# Altium PCB TP3.PcbDoc
Units mm, origin at the board's own origin, x right, y up, seen from the top; angles counter-clockwise.
Board outline 39.6 x 79.35 mm, 2 copper layers (Top Layer, Bottom Layer); 36 components, 23 nets, 140 pads, 2 vias.
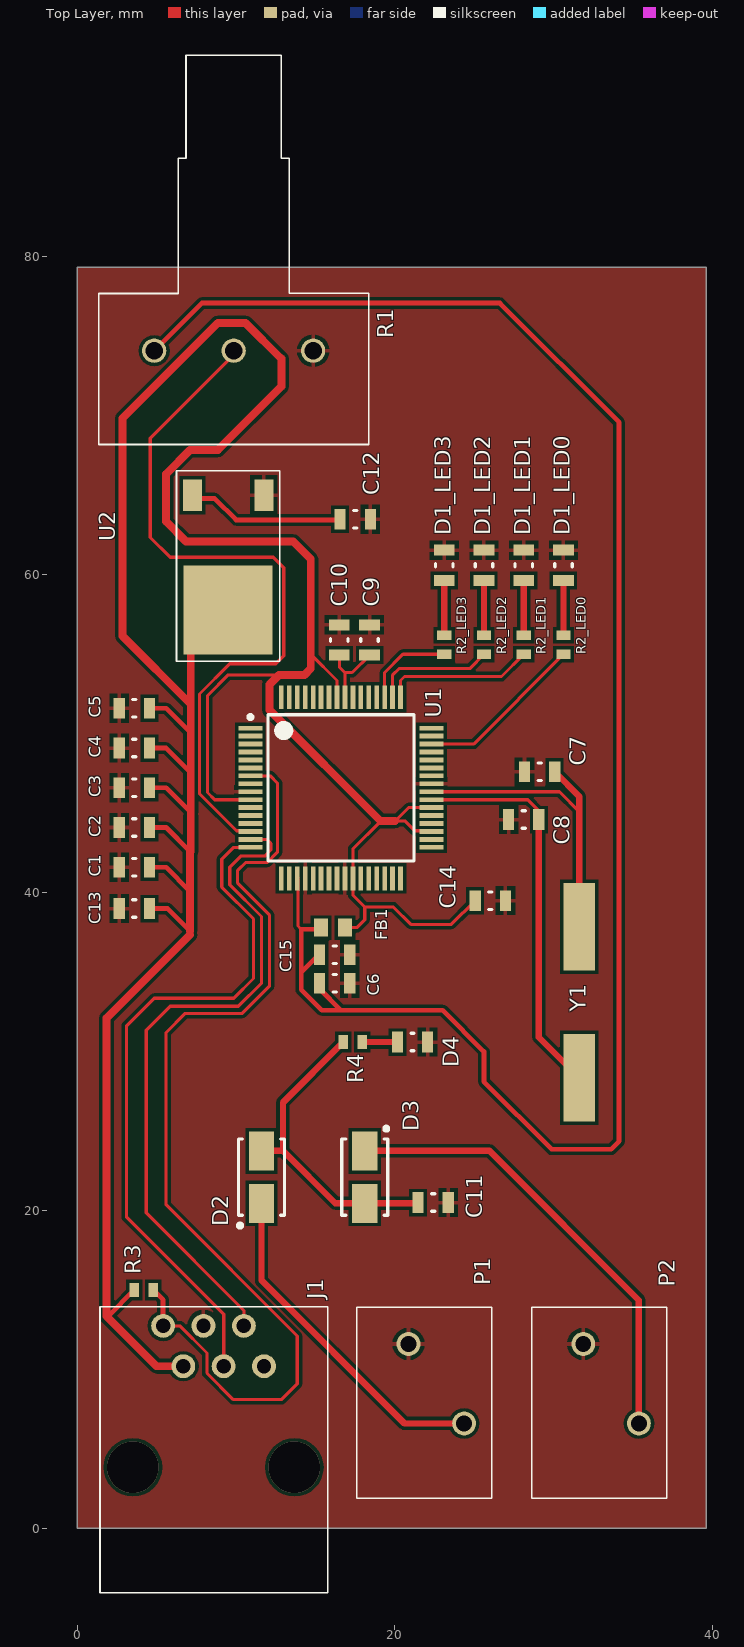
[diagram p0: Top Layer view]
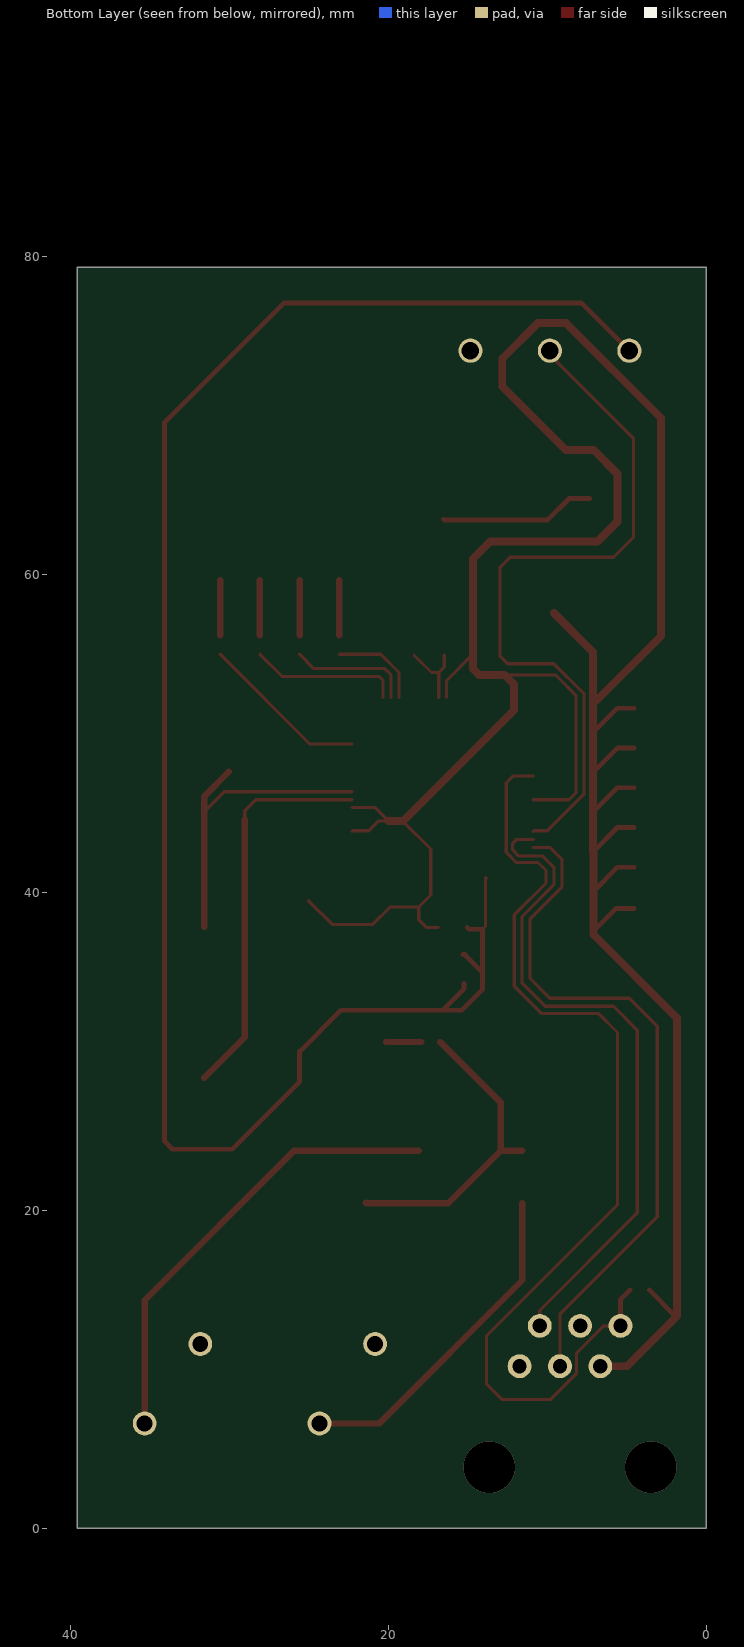
[diagram p1: Bottom Layer view, seen from below]

## Layer stack, top to bottom
Top Solder: solder mask 0.0102, Solder Resist, Dk 3.5
Top Layer: signal copper 0.0356
Dielectric 1: dielectric 0.32, FR-4, Dk 4.8
Bottom Layer: signal copper 0.0356
Bottom Solder: solder mask 0.0102, Solder Resist, Dk 3.5

## Board outline
0,0 39.6,0 39.6,79.35 0,79.35

## Design rules (kind name [scope] priority, off if disabled: settings)
Clearance [All] p1: gap=0.2
HoleSize [All] p1: absolutevalues=TRUE maxlimit=1000 minlimit=0.3 maxpercent=80.000 minpercent=20.000
PolygonConnect [All] p1: connectstyle=Relief reliefconductorwidth=0.254 reliefentries=4 polygonreliefangle="90 Angle" airgapwidth=0.254
RoutingVias [All] p1: holewidth=0.5 width=1.27 viastyle="Through Hole" minholewidth=0.3 minwidth=1.27 maxholewidth=0.711 maxwidth=1.27
SilkToBoardRegionClearance [All] p1 off:
SilkToSilkClearance [All] p1: silktosilkclearance=0.1
SilkToSolderMaskClearance [IsPad] p1: minsilkscreentomaskgap=0.1 clearancetoexposedcopper=TRUE
SolderMaskExpansion [All] p1: expansion=0.102
UnpouredPolygon [All] p1: allowunpoured=FALSE
Width [All] p1: maxlimit=0.5 minlimit=0.2 preferedwidth=0.3
25 further rules are at their usual default settings.

## Classes and differential pairs
channel class led: LED0 LED1 LED2 LED3
net class LED[0..3]: LED0 LED1 LED2 LED3
component class TP2: R1
component class POWER: C11 C12 C13 C14 C15 D2 D3 D4 FB1 P1 P2 R4 U2
component class PIC: C1 C2 C3 C4 C5 C6 C7 C8 C9 C10 J1 R3 Y1
component class LED3: D1_LED3 R2_LED0
component class LED2: D1_LED2 R2_LED0
component class LED1: D1_LED1 R2_LED0
component class LED0: D1_LED0 R2_LED0

## Components (designator, comment, footprint, x,y, rotation, side; value= is the part's Value field where it differs from the comment)
C1 "100nF" 2012/0805 3.6,41.6 r0 top
C2 "100nF" 2012/0805 3.6,44.1 r0 top
C3 "100nF" 2012/0805 3.6,46.6 r0 top
C4 "100nF" 2012/0805 3.6,49.1 r0 top
C5 "100nF" 2012/0805 3.6,51.6 r0 top
C6 "100nF" 2012/0805 16.2,36.1 r180 top
C7 "20pF" 2012/0805 28.1,44.6 r180 top
C8 "20pF" 2012/0805 29.1,47.6 r180 top
C9 "10uF" 2012/0805 18.4,55.9 r270 top
C10 "1uF" 2012/0805 16.5,55.9 r270 top
C11 "10uF" 2012/0805 22.4,20.5 r180 top
C12 "10uF" 2012/0805 17.5,63.5 r180 top
C13 "10uF" 2012/0805 3.6,39 r0 top
C14 "1uF" 2012/0805 26,39.5 r180 top
C15 "100nF" 2012/0805 16.2,34.3 r180 top
D1_LED0 "Green LED" 2012/0805 30.6,60.6 r90 top (schematic designator D1)
D1_LED1 "Green LED" 2012/0805 28.1,60.6 r90 top (schematic designator D1)
D1_LED2 "Green LED" 2012/0805 25.6,60.6 r90 top (schematic designator D1)
D1_LED3 "Green LED" 2012/0805 23.1,60.6 r90 top (schematic designator D1)
D2 "GF1A" SMA/DO-214AC_21 11.6,22.1 r90 top
D3 "GF1A" SMA/DO-214AC_21 18.1,22.1 r270 top
D4 "Green LED" 2012/0805 21.1,30.6 r0 top
FB1 "600r" INDC1608AN 16.1,37.8 r180 top
J1 "Program / Debug" TD03B_N 8.6,6.6 r0 top
P1 "12V Main" PHOENIX_1985195 17.6,11.6 r0 top
P2 "12V Battery" PHOENIX_1985195 28.6,11.6 r0 top
R1 "1K" Potentiometer 9.85,74.1 r0 top
R2_LED0 "330r" 1608/0603 30.6,55.6 r270 top (schematic designator R2)
R2_LED1 "330r" 1608/0603 28.1,55.6 r270 top (schematic designator R2)
R2_LED2 "330r" 1608/0603 25.6,55.6 r270 top (schematic designator R2)
R2_LED3 "330r" 1608/0603 23.1,55.6 r270 top (schematic designator R2)
R3 "4.7k" 1608/0603 4.2,15 r180 top
R4 "470r" 1608/0603 17.35,30.6 r180 top
U1 "PIC32MX764F128H-I/PT" PIC32MX 16.6,46.6 r0 top
U2 "AP1117" AP1117 9.5,57.8 r180 top
Y1 "8MHz" XTAL139X50X45 31.6,33.1 r270 top

## Footprints (in the part's own frame and the unit in brackets; to place one, negate y for a bottom-side part, rotate by r counter-clockwise, add the part's x,y. Pads: shape width x height; smd on the part's side, far side on the other; paste and mask are expansions set on the pad)
1608/0603 [mm]
  rect 0.6x0.9 smd: 1(-0.6,0) 2(0.6,0)
  body extent -0.77,-0.43 0.78,0.42, height 0.45
2012/0805 [mm]
  rect 0.7x1.3 smd: 1(-0.95,0) 2(0.95,0)
  silkscreen extent -0.1,-0.55 0.1,0.55, body extent -1,-0.6 1,0.6, height 0.45
AP1117 [mm]
  rect 1.2x2 smd: 1(-2.25,-7.2) 3(2.25,-7.2)
  rect 5.6x5.6 smd: 2(0,0)
  silkscreen extent -3.25,-8.75 3.25,3.25
INDC1608AN [mm]
  rect 0.88x1.12 smd: 1(-0.76,0) 2(0.76,0)
  body extent -0.9,-0.5 0.9,0.5, height 0.8
PHOENIX_1985195 [mm]
  round 1.5 hole 1: 1(6.75,-5) 2(3.25,0)
  silkscreen extent 0,-9.7 8.5,2.3
PIC32MX [mm] "TSQFP, 64-Leads, Body 10.00x10.00mm, Pitch 0.50mm, IPC Low Density"
  rect 1.5x0.3 smd: 1(-5.7,3.75) 2(-5.7,3.25) 3(-5.7,2.75) 4(-5.7,2.25) 5(-5.7,1.75) 6(-5.7,1.25) 7(-5.7,0.75) 8(-5.7,0.25) 9(-5.7,-0.25) 10(-5.7,-0.75) 11(-5.7,-1.25) 12(-5.7,-1.75) 13(-5.7,-2.25) 14(-5.7,-2.75) 15(-5.7,-3.25) 16(-5.7,-3.75) 33(5.7,-3.75) 34(5.7,-3.25) 35(5.7,-2.75) 36(5.7,-2.25) 37(5.7,-1.75) 38(5.7,-1.25) 39(5.7,-0.75) 40(5.7,-0.25) 41(5.7,0.25) 42(5.7,0.75) 43(5.7,1.25) 44(5.7,1.75) 45(5.7,2.25) 46(5.7,2.75) 47(5.7,3.25) 48(5.7,3.75)
  rect 0.3x1.5 smd: 17(-3.75,-5.7) 18(-3.25,-5.7) 19(-2.75,-5.7) 20(-2.25,-5.7) 21(-1.75,-5.7) 22(-1.25,-5.7) 23(-0.75,-5.7) 24(-0.25,-5.7) 25(0.25,-5.7) 26(0.75,-5.7) 27(1.25,-5.7) 28(1.75,-5.7) 29(2.25,-5.7) 30(2.75,-5.7) 31(3.25,-5.7) 32(3.75,-5.7) 49(3.75,5.7) 50(3.25,5.7) 51(2.75,5.7) 52(2.25,5.7) 53(1.75,5.7) 54(1.25,5.7) 55(0.75,5.7) 56(0.25,5.7) 57(-0.25,5.7) 58(-0.75,5.7) 59(-1.25,5.7) 60(-1.75,5.7) 61(-2.25,5.7) 62(-2.75,5.7) 63(-3.25,5.7) 64(-3.75,5.7)
  silkscreen extent -5.82,-4.6 4.6,4.6, body extent -5,-5 5,5, height 1.2
Potentiometer [mil]
  round 60 hole 43.31: 1(-196.85,0) 2(0,0) 3(196.85,0)
  silkscreen extent -335,-232 335,732
SMA/DO-214AC_21 [mm]
  rect 2.45x1.6 smd: 1(-1.65,0) 2(1.65,0)
  silkscreen extent -3.17,-1.45 2.4,1.47, body extent -2.37,-1.45 2.38,1.45, height 3
TD03B_N [mm]
  round 1.5 hole 0.9: 1(-3.19,6.14) 2(-1.92,3.6) 3(-0.65,6.14) 4(0.62,3.6) 5(1.89,6.14) 6(3.16,3.6)
  silkscreen extent -7.16,-10.66 7.17,7.34
XTAL139X50X45 [mm]
  rect 5.5x2 smd: 1(-4.75,0) 2(4.75,0)

## Part data
C1 C2 C3 C4 C5 C6 C7 C8 C9 C10 C12 C13 C14 C15: library part Capacitor, "Capacitor"
C11: library part Capacitor
D1_LED0 D1_LED1 D1_LED2 D1_LED3: library part LED
D2 D3: library part Diode, "Diode"
D4: library part LED, "LED"
FB1: library part Inductor, "Inductor"
J1: library part "Header 6", "Header, 6-Pin"
P1 P2: library part "Header 2", "Header, 2-Pin"
R1: library part RPot, "Potentiometer"
R2_LED0 R2_LED1 R2_LED2 R2_LED3 R3 R4: library part Resistor, "Resistor"
U1: library part PIC
U2: "Voltage Regulator"
Y1: library part Crystal, "Crystal Oscillator"

## Via types
v1: diameter 3.25, hole 3.25, Top Layer to Bottom Layer, 2 vias

## Nets (pads, with @x,y where several pads share a name; then routed paths per layer and width w, separated by ;. In a path a pad name is that pad's centre, name@x,y a point inside that pad or via, vN(x,y) a via of type N, cw(c..) or ccw(c..) an arc to the next point about the centre after c; other vN are vias at no path point)
ALIM: D2.1 P1.1 | length 21.3
  Top Layer w0.4: D2.1 11.6,15.6 20.6,6.6 P1.1
BATTERY: D3.1 P2.1 | length 28.9
  Top Layer w0.4: D3.1 25.95,23.75 35.35,14.35 P2.1
GND: C1.1 C2.1 C3.1 C4.1 C5.1 C6.1 C7.2 C8.2 C9.1 C10.1 C11.1 C12.1 C13.1 C14.1 C15.1 D1_LED0.2 D1_LED1.2 D1_LED2.2 D1_LED3.2 D4.2 J1.3 P1.2 P2.2 R1.3 U1.9 U1.20 U1.25 U1.41 U2.1
LED0: R2_LED0.2 U1.46 | length 10.6
  Top Layer w0.2: U1.46 24.95,49.35 R2_LED0.2
LED1: R2_LED1.2 U1.49 | length 9.5
  Top Layer w0.2: U1.49 20.35,53.35 20.6,53.6 26.7,53.6 R2_LED1.2
LED2: R2_LED2.2 U1.50 | length 7.7
  Top Layer w0.2: U1.50 19.85,53.7 20.25,54.1 24.7,54.1 R2_LED2.2
LED3: R2_LED3.2 U1.51 | length 5.8
  Top Layer w0.2: U1.51 19.35,53.85 20.5,55 R2_LED3.2
MCLR: J1.1 R3.1 U1.7 | length 64.6
  Top Layer w0.2: J1.1 6.46,12.74 8.17,11.03 8.17,9.765 9.835,8.1 12.85,8.1 13.85,9.1 13.85,12.1 5.6,20.35 5.6,31.2 6.8,32.4 10.4,32.4 12.1,34.1 12.1,38.6 10.1,40.6 10.1,41.4 10.6,41.9 11.966,41.9 12.6,42.534 12.6,46.9 12.15,47.35 U1.7
  Top Layer w0.3: R3.1 5.41,14.39 J1.1
NetC9_2: C9.2 C10.2 U1.56 | length 4.8
  Top Layer w0.2: C10.2 16.5,54.2 16.85,53.85 ; U1.56 16.85,53.85 ; C9.2 17.3,53.85 16.85,53.85
NetD1_LED0_1: D1_LED0.1 R2_LED0.1 | length 3.5
  Top Layer w0.4: R2_LED0.1 D1_LED0.1
NetD1_LED1_1: D1_LED1.1 R2_LED1.1 | length 3.5
  Top Layer w0.4: R2_LED1.1 D1_LED1.1
NetD1_LED2_1: D1_LED2.1 R2_LED2.1 | length 3.4
  Top Layer w0.4: R2_LED2.1 D1_LED2.1
NetD1_LED3_1: D1_LED3.1 R2_LED3.1 | length 3.5
  Top Layer w0.4: R2_LED3.1 D1_LED3.1
NetD4_1: D4.1 R4.1 | length 2.2
  Top Layer w0.4: R4.1 D4.1
NetR1_2: R1.2 U1.14 | length 45.4
  Top Layer w0.2: R1.2 9.85,73.85 4.6,68.6 4.6,62.35 5.85,61.1 12.35,61.1 13,60.45 13,54.9 12.5,54.4 9.6,54.4 7.7,52.5 7.7,46.226 10.026,43.9 10.85,43.9 U1.14
PGC: J1.5 U1.15 | length 42.6
  Top Layer w0.2: J1.5 10.49,13.71 4.35,19.85 4.35,31.35 5.85,32.85 10.15,32.85 11.6,34.3 11.6,38.5 9.6,40.5 9.6,41.6 10.3,42.3 11.8,42.3 12.2,42.7 12.2,43.1 11.95,43.35 U1.15
PGD: J1.4 U1.16 | length 43.6
  Top Layer w0.2: J1.4 9.22,13.48 3.1,19.6 3.1,31.6 4.85,33.35 9.85,33.35 11.1,34.6 11.1,38.35 9.1,40.35 9.1,42.1 9.85,42.85 U1.16
V3P3: C1.2 C2.2 C3.2 C4.2 C5.2 C13.2 C14.2 FB1.1 J1.2 R3.2 U1.10 U1.26 U1.35 U1.38 U1.57 U2.2 | length 194.4
  Top Layer w0.2: 7.15,43.85 7.15,43.9 ; U1.10 8.65,45.85 8.2,46.3 8.2,52.4 9.5,53.7 12.7,53.7 ; 14.7,55 16.35,53.35 U1.57 ; FB1.1 17.6,37.8 18.1,38.3 18.1,39.1 ; 19.1,44.5 17.35,42.75 U1.26 17.35,39.85 18.1,39.1 ; U1.35 22.25,43.9 21.25,43.9 20.65,44.5 20,44.5 20.85,45.35 U1.38 ; C14.2 23.55,38 21,38 19.9,39.1 18.1,39.1
  Top Layer w0.3: 1.85,13.35 1.95,13.35 R3.2 ; C13.2 5.7,39 7.1,37.6 7.1,37.35 ; C1.2 5.6,41.6 7.1,40.1 ; C2.2 5.6,44.1 7.1,42.6 7.15,42.6 ; C3.2 5.6,46.6 7.15,45.05 7.15,44.85 ; C4.2 5.6,49.1 7.1,47.6 7.15,47.6 ; C5.2 5.6,51.6 7.15,50.05
  Top Layer w0.5: J1.2 5,10.2 1.85,13.35 1.85,32.1 7.1,37.35 ; 7.1,37.6 7.1,40.1 7.1,42.6 ; 7.15,42.6 7.15,43.85 ; 7.15,43.9 7.15,44.85 ; 7.15,45.05 7.15,47.6 7.15,50.05 7.15,51.85 ; U2.2@9.6,57.6 7.15,55.15 7.15,51.85 ; 20,44.5 19.1,44.5 12.1,51.5 12.1,53.1 12.7,53.7 14.3,53.7 14.7,54.1 14.7,55 14.7,61 13.6,62.1 6.85,62.1 5.6,63.35 5.6,66.35 7.1,67.85 8.85,67.85 12.85,71.85 12.85,73.6 10.6,75.85 8.85,75.85 2.85,69.85 2.85,56.15 7.15,51.85
V3P3A: C6.2 C15.2 FB1.2 R1.1 U1.19 | length 116.5
  Top Layer w0.2: U1.19@13.9,40.95 U1.19 13.9,40.85 13.9,37.9 14.1,37.7
  Top Layer w0.3: R1.1 7.85,77.1 26.6,77.1 34.1,69.6 34.1,24.35 33.6,23.85 29.85,23.85 25.6,28.1 25.6,30 23,32.6 16.6,32.6 ; FB1.2@15.05,37.8 14.95,37.7 14.1,37.7 14.1,35 ; C15.2 15.25,33.95 16.6,32.6 ; C6.2@15.34,36.1 15.2,36.1 14.1,35 ; 14.1,35 14.1,33.9 15.4,32.6 16.6,32.6
V5: C11.2 D2.2 D3.2 R4.2 | length 19.7
  Top Layer w0.4: D2.2 12.95,23.75 ; R4.2 12.95,26.8 12.95,23.75 ; C11.2 21.4,20.45 D3.2 16.25,20.45 12.95,23.75
VCC: C12.2 U2.3 | length 9.8
  Top Layer w0.3: U2.3@7.35,64.8 8.65,64.8 10,63.45 16.5,63.45 C12.2
X1: C7.1 U1.39 Y1.2 | length 24.9
  Top Layer w0.2: U1.39 28.35,45.85 29.05,45.15 C7.1
  Top Layer w0.4: C7.1 29.05,30.9 Y1.2
X2: C8.1 U1.40 Y1.1 | length 20.2
  Top Layer w0.2: U1.40 30.35,46.35 31.6,45.1
  Top Layer w0.4: C8.1 31.6,46.05 31.6,45.1 Y1.1
pads on no net: J1.6 U1.1 U1.2 U1.3 U1.4 U1.5 U1.6 U1.8 U1.11 U1.12 U1.13 U1.17 U1.18 U1.21 U1.22 U1.23 U1.24 U1.27 U1.28 U1.29 U1.30 U1.31 U1.32 U1.33 U1.34 U1.36 U1.37 U1.42 U1.43 U1.44 U1.45 U1.47 U1.48 U1.52 U1.53 U1.54 U1.55 U1.58 U1.59 U1.60 U1.61 U1.62 U1.63 U1.64
copper on no net:
  other v1: 3.51,3.84 13.67,3.84

## Polygon pours and split planes (outlines as drawn)
GND on Top Layer "Top Layer-No Net" (solid, remove dead copper, pour order 15): 0,79.35 39.6,79.35 39.6,0 0,0

## Silkscreen, mask and mechanical layers (free items; w line width, h text height)
Drill Drawing:
  circle w0.085: c45.465,14.708 r0.635
  lines w0.085: 44.83,6.77 45.148,6.77 45.465,6.453 45.783,6.77 46.1,6.77 45.783,7.088 46.1,7.405 45.783,7.405 45.465,7.723 45.148,7.405 44.83,7.405 45.148,7.088 44.83,6.77 ; 44.83,10.263 46.1,10.263 46.1,11.533 44.83,11.533 44.83,10.263 ; 44.83,19.153 46.1,19.153 45.465,17.883 44.83,19.153
  lines w0.381: 43.1,5.31 141.626,5.31 ; 43.1,20.55 141.626,20.55 ; 57.092,1.5 57.092,24.36 ; 74.817,1.5 74.817,24.36 ; 108.995,1.5 108.995,24.36 ; 121.844,1.5 121.844,24.36 ; 43.1,1.5 141.626,1.5 141.626,24.36 43.1,24.36 43.1,1.5
  text "Symbol" at 45.386,21.693 h1.83
  text "Hit Count" at 58.235,21.693 h1.83
  text "Finished Hole Size" at 75.96,21.693 h1.83
  text "Plated" at 110.138,21.693 h1.83
  text "Hole Type" at 122.987,21.693 h1.83
  text "2" at 58.235,17.883 h1.52
  text "3.250mm (127.95mil)" at 75.96,17.883 h1.52
  text "PTH" at 110.138,17.883 h1.52
  text "Round" at 122.987,17.883 h1.52
  text "3" at 58.235,14.073 h1.52
  text "1.100mm (43.31mil)" at 75.96,14.073 h1.52
  text "PTH" at 110.138,14.073 h1.52
  text "Round" at 122.987,14.073 h1.52
  text "4" at 58.235,10.263 h1.52
  text "1.000mm (39.37mil)" at 75.96,10.263 h1.52
  text "PTH" at 110.138,10.263 h1.52
  text "Round" at 122.987,10.263 h1.52
  text "6" at 58.235,6.453 h1.52
  text "0.900mm (35.43mil)" at 75.96,6.453 h1.52
  text "PTH" at 110.138,6.453 h1.52
  text "Round" at 122.987,6.453 h1.52
  text "15 Total" at 58.235,2.643 h1.52
mechanical drawings:
  lines w0.254: -5.508,1.524 -5,0 ; -5.508,77.826 -5,79.35 ; -5.254,0 -4.746,0 ; -5.254,79.35 -4.746,79.35 ; -5,32.265 -5,0 ; -5,47.085 -5,79.35 ; -4.492,1.524 -5,0 ; -4.492,77.826 -5,79.35 ; 0,-5.254 0,-4.746 ; 1.524,-5.508 0,-5 ; 1.524,-4.492 0,-5 ; 13.152,-5 0,-5 ; 26.448,-5 39.6,-5 ; 38.076,-5.508 39.6,-5 ; 38.076,-4.492 39.6,-5 ; 39.6,-5.254 39.6,-4.746
  text "79.35 (mm)" at -3.938,32.519 h1.52 r90
  text "39.6 (mm)" at 13.406,-6.062 h1.52
board shape:
  the board outline again, w0.2